# Altium PCB POT 2x8.PcbDoc
Units mm, origin at the board's own origin, x right, y up, seen from the top; angles counter-clockwise.
Board outline 123 x 37.95 mm, 4 copper layers (Top Layer, Mid Layer 1, Mid Layer 2, Bottom Layer), stack 0.97 mm thick; 84 components, 86 nets, 383 pads, 105 vias.
Unrouted connection lines stored in the file: 15.
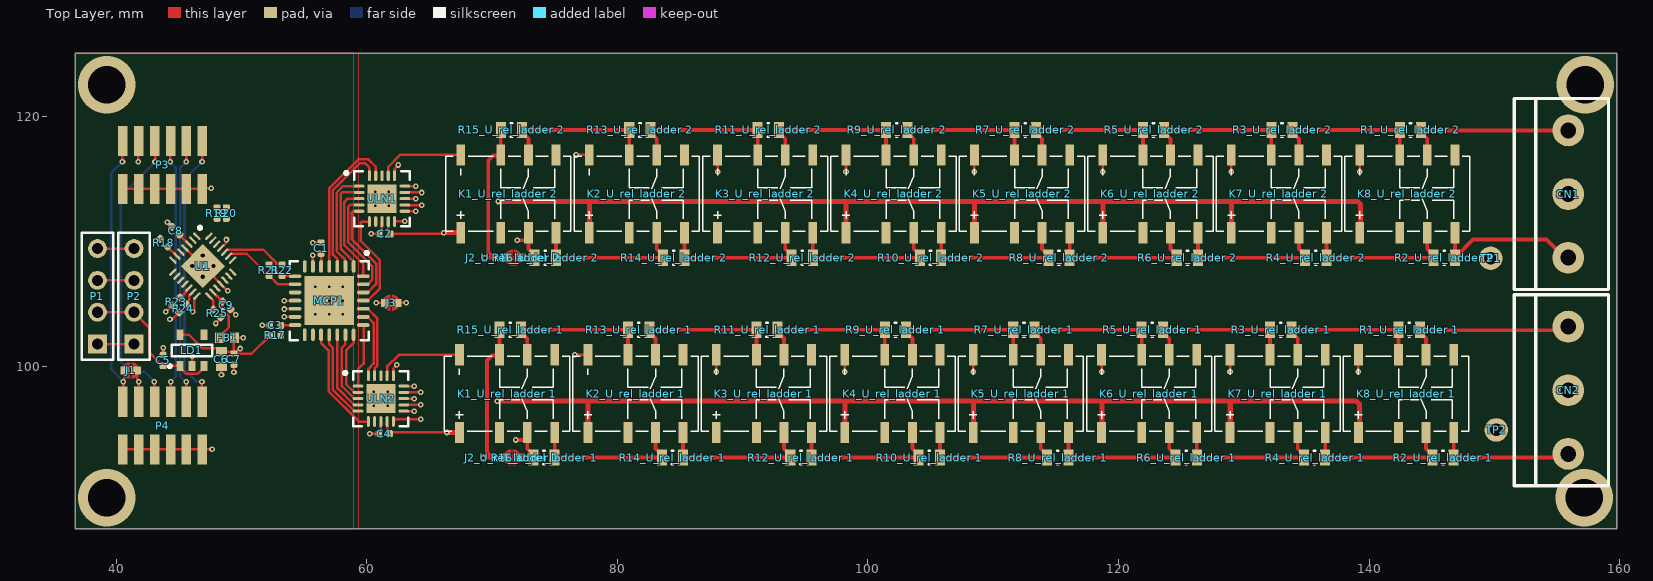
[diagram p0: Top Layer view]
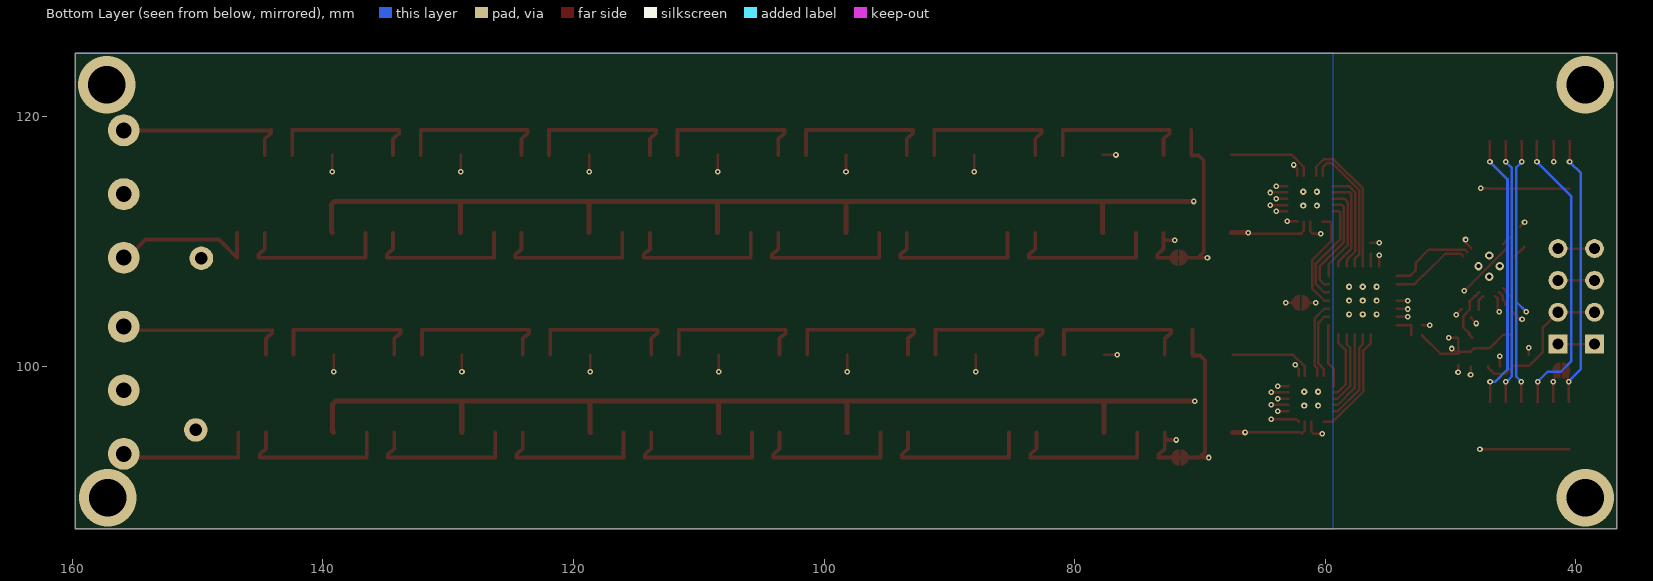
[diagram p1: Bottom Layer view, seen from below]
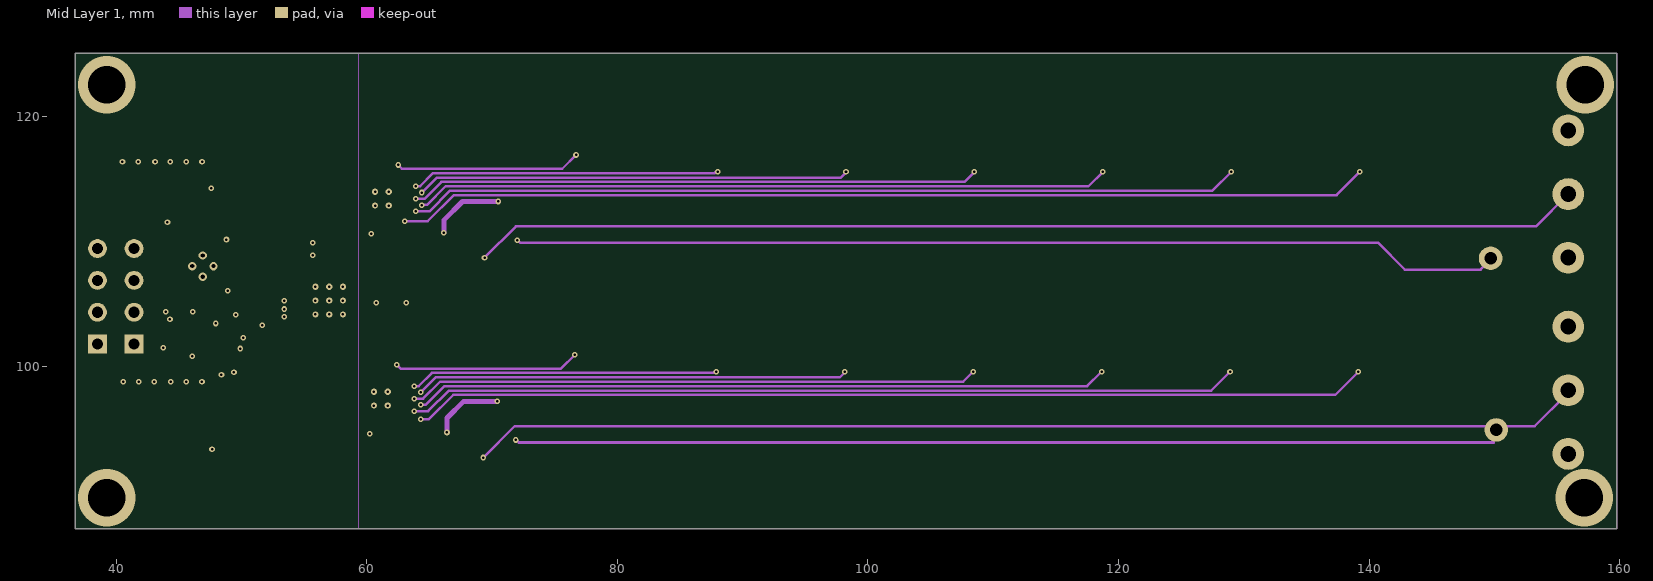
[diagram p2: Mid Layer 1]
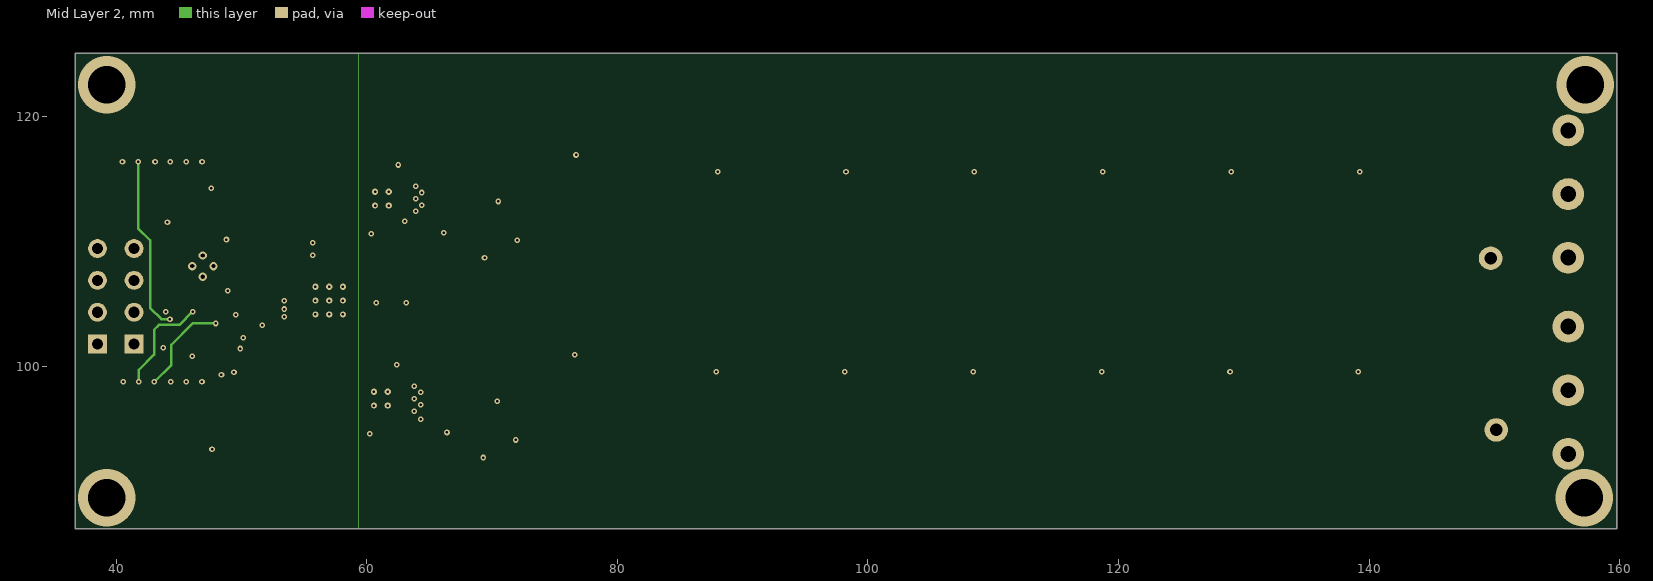
[diagram p3: Mid Layer 2]
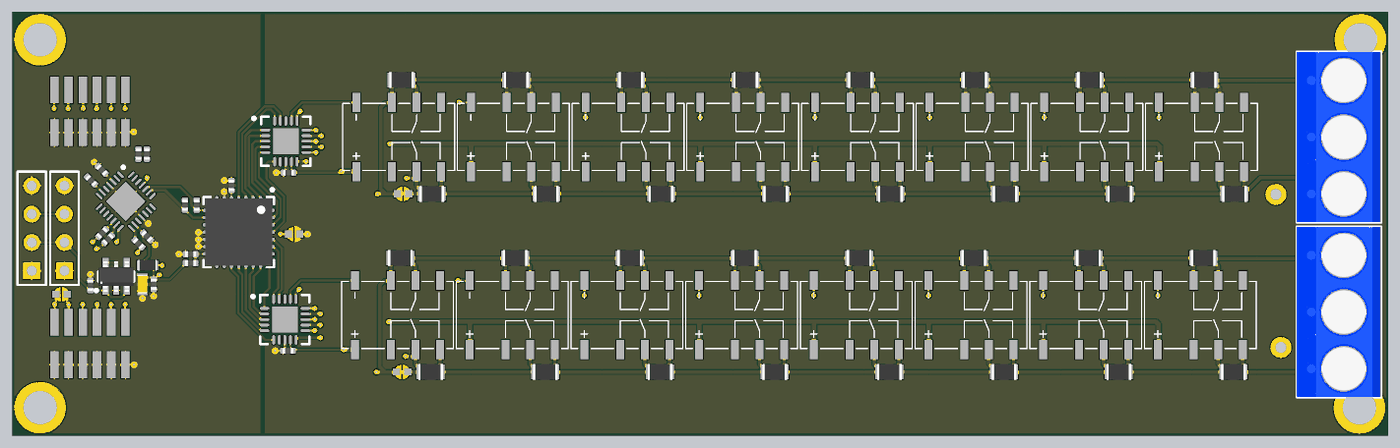
[diagram p4: 3D render of the assembled board from above, using the file's embedded part models]

## Layer stack, top to bottom
Top Solder: solder mask 0.0127, Solder Resist, Dk 3.8
Top Layer: signal copper 0.035
Dielectric 1: prepreg 0.1, 2313, Dk 4.05
Mid Layer 1: signal copper 0.0175
Core: core 0.665, FR-4, Dk 4.5
Mid Layer 2: signal copper 0.0175
Dielectric 2: prepreg 0.1, 2313, Dk 4.05
Bottom Layer: signal copper 0.035
Bottom Solder: solder mask 0.0127, Solder Resist, Dk 3.8

## Board outline
36.75,87.05 36.75,125 159.75,125 159.75,87.05

## Design rules (kind name [scope] priority, off if disabled: settings)
BoardOutlineClearance [All] p1: gap=0.2 ignorepadtopadclearanceinfootprint=FALSE
Clearance [All] p1: gap=0.102 ignorepadtopadclearanceinfootprint=FALSE except(0.127: Arc-Via Track-Via SMDPad-Via THPad-Via Via-Via Via-Fill Via-Poly Via-Region Via-Text; 0.25: Arc-Hole Track-Hole SMDPad-Hole THPad-Hole Via-Hole Fill-Hole Poly-Hole Region-Hole Text-Hole)
ComponentClearance [All] p1: gap=0.102 collisioncheckmode=3 verticalgap=0.102 showdistances=TRUE
DiffPairsRouting [All] p1: maxlimit=0.102 minlimit=0.102 mostfreqgap=0.102 toplayer_minwidth=0.102 toplayer_maxwidth=1816.048 toplayer_prefwidth=0.102 midlayer1_minwidth=0.102 midlayer1_maxwidth=1816.048 midlayer1_prefwidth=0.102 midlayer2_minwidth=0.102 midlayer2_maxwidth=1816.048 midlayer2_prefwidth=0.102 bottomlayer_minwidth=0.102 bottomlayer_maxwidth=1816.048 bottomlayer_prefwidth=0.102 maxuncoupledlength=12.7
Height [All] p1: minheight=0 maxheight=1816.048 prefheight=12.7
HoleSize [All] p1: absolutevalues=TRUE maxlimit=6.3 minlimit=0.2 maxpercent=80.000 minpercent=20.000
HoleToHoleClearance [All] p1: gap=0.25 allowstackedmicrovias=FALSE
MinimumAnnularRing [All] p1: minimumring=0.076
MinimumSolderMaskSliver [All] p1: minsoldermaskwidth=0
PlaneClearance [All] p1: clearance=0.102
PlaneConnect PlaneConnectPowerPads [InPadClass('PowerPads')] p1: planeconnectstyle=Direct reliefexpansion=0.508 reliefentries=4 reliefconductorwidth=0.254 reliefairgap=0.254
PlaneConnect [All] p2: pad.planeconnectstyle=Relief pad.reliefexpansion=0.3 pad.reliefentries=4 pad.reliefconductorwidth=0.102 pad.reliefairgap=0.102 via.planeconnectstyle=Direct via.reliefexpansion=0.3 via.reliefentries=4 via.reliefconductorwidth=0.127 via.reliefairgap=0.127
PolygonConnect PolygonConnectPowerPads [All vs (InPadClass('PowerPads'))] p1: connectstyle=Direct reliefconductorwidth=0.254 reliefentries=4 polygonreliefangle="90 Angle" airgapwidth=0.254
PolygonConnect [All] p2: thpad.connectstyle=Relief thpad.reliefconductorwidth=0.102 thpad.reliefentries=4 thpad.polygonreliefangle="90 Angle" thpad.airgapwidth=0.102 smdpad.connectstyle=Relief smdpad.reliefconductorwidth=0.102 smdpad.reliefentries=4 smdpad.polygonreliefangle="90 Angle" smdpad.airgapwidth=0.102 via.connectstyle=Direct via.reliefconductorwidth=0.127 via.reliefentries=4 via.polygonreliefangle="90 Angle" via.airgapwidth=0.127
RoomDefinition "POT 2x8" [InComponentClass('POT 2x8')] p1: confinementstyle=ConfineIn formatcopy=TRUE lockcomponents=FALSE outline 36.85,89.95 159.5,89.95 159.5,123.9 36.85,123.9
RoomDefinition "U_rel_ladder 1" [InComponentClass('U_rel_ladder 1')] p2: confinementstyle=ConfineIn formatcopy=TRUE lockcomponents=FALSE outline 57.8,91.65 162.15,91.65 162.15,104.05 57.8,104.05
RoomDefinition "U_rel_ladder 2" [InComponentClass('U_rel_ladder 2')] p3: confinementstyle=ConfineIn formatcopy=TRUE lockcomponents=FALSE outline 57.9,107.6 162.25,107.6 162.25,120 57.9,120
RoutingVias [All] p1: holewidth=0.2 width=0.45 viastyle="Through Hole" minholewidth=0.2 minwidth=0.45 maxholewidth=6.3 maxwidth=6.55
SilkToSilkClearance [All] p1: silktosilkclearance=0
SilkToSolderMaskClearance [IsPad] p1: minsilkscreentomaskgap=0.102 clearancetoexposedcopper=TRUE
SolderMaskExpansion [All] p1: expansion=0.075 istentingtop=FALSE
Width [All] p1: maxlimit=1816.048 minlimit=0.102 preferedwidth=0.102
20 further rules are at their usual default settings.

## Classes and differential pairs
component class "U_rel_ladder 2": "J2_U_rel_ladder 2" "K1_U_rel_ladder 2" "K2_U_rel_ladder 2" "K3_U_rel_ladder 2" "K4_U_rel_ladder 2" "K5_U_rel_ladder 2" "K6_U_rel_ladder 2" "K7_U_rel_ladder 2" "K8_U_rel_ladder 2" "R1_U_rel_ladder 2" "R2_U_rel_ladder 2" "R3_U_rel_ladder 2" "R4_U_rel_ladder 2" "R5_U_rel_ladder 2" "R6_U_rel_ladder 2" "R7_U_rel_ladder 2" "R8_U_rel_ladder 2" "R9_U_rel_ladder 2" "R10_U_rel_ladder 2" "R11_U_rel_ladder 2" "R12_U_rel_ladder 2" "R13_U_rel_ladder 2" "R14_U_rel_ladder 2" "R15_U_rel_ladder 2" "R16_U_rel_ladder 2"
channel class rel_ladder: U_rel_ladder2 "U_rel_ladder 1"
component class "U_rel_ladder 1": "J2_U_rel_ladder 1" "K1_U_rel_ladder 1" "K2_U_rel_ladder 1" "K3_U_rel_ladder 1" "K4_U_rel_ladder 1" "K5_U_rel_ladder 1" "K6_U_rel_ladder 1" "K7_U_rel_ladder 1" "K8_U_rel_ladder 1" "R1_U_rel_ladder 1" "R2_U_rel_ladder 1" "R3_U_rel_ladder 1" "R4_U_rel_ladder 1" "R5_U_rel_ladder 1" "R6_U_rel_ladder 1" "R7_U_rel_ladder 1" "R8_U_rel_ladder 1" "R9_U_rel_ladder 1" "R10_U_rel_ladder 1" "R11_U_rel_ladder 1" "R12_U_rel_ladder 1" "R13_U_rel_ladder 1" "R14_U_rel_ladder 1" "R15_U_rel_ladder 1" "R16_U_rel_ladder 1"
component class "POT 2x8": C1 C2 C3 C4 C5 C6 C7 C8 C9 CN1 CN2 FB1 J1 J3 LD1 MCP1 P1 P2 P3 P4 R17 R18 R19 R20 R21 R22 R23 R24 R25 TP1 TP2 U1 ULN1 ULN2

## Components (designator, comment, footprint, x,y, rotation, side; value= is the part's Value field where it differs from the comment)
C1 "100n" R1005_0402i_L 56.35,109.46 r270 top
C2 "100n" R1005_0402i_L 61.45,110.6 r180 top
C3 "100n" R1005_0402i_L 52.7,103.3 r0 top
C4 "100n" R1005_0402i_L 61.4,94.65 r180 top
C5 "100n" R1005_0402i_L 43.75,100.5 r90 top
C6 "1u" C1608_0603I_L 48.4,100.6 r270 top
C7 "100n" R1005_0402i_L 49.4,100.6 r270 top
C8 "100n" R1005_0402i_L 44.75,110.85 r135 top
C9 "100n" R1005_0402i_L 48.8,104.9 r315 top
CN1 "VRSTNA SPONKA 3P/16A" "VRSTNA SPONKA 3P/16A" 155.9,118.86 r270 top
CN2 "VRSTNA SPONKA 3P/16A" "VRSTNA SPONKA 3P/16A" 155.9,103.2 r270 top
FB1 "FERITTE BEAD" R1608_0603I_L 48.85,102.3 r180 top
J1 "Terminator" solderJumper 41.158,99.7 r0 top
"J2_U_rel_ladder 1" "JMP_mini" solderJumper 71.6,92.75 r180 top (schematic designator J2)
"J2_U_rel_ladder 2" "JMP_mini" solderJumper 71.7,108.7 r180 top (schematic designator J2)
J3 "JMP_mini" solderJumper 61.95,105.1 r0 top
"K1_U_rel_ladder 1" "DPDT" "AXICOM IM-G Relay" 71.2,97.85 r0 top (schematic designator K1)
"K1_U_rel_ladder 2" "DPDT" "AXICOM IM-G Relay" 71.3,113.8 r0 top (schematic designator K1)
"K2_U_rel_ladder 1" "DPDT" "AXICOM IM-G Relay" 81.45,97.85 r0 top (schematic designator K2)
"K2_U_rel_ladder 2" "DPDT" "AXICOM IM-G Relay" 81.55,113.8 r0 top (schematic designator K2)
"K3_U_rel_ladder 1" "DPDT" "AXICOM IM-G Relay" 91.7,97.85 r0 top (schematic designator K3)
"K3_U_rel_ladder 2" "DPDT" "AXICOM IM-G Relay" 91.8,113.8 r0 top (schematic designator K3)
"K4_U_rel_ladder 1" "DPDT" "AXICOM IM-G Relay" 101.95,97.85 r0 top (schematic designator K4)
"K4_U_rel_ladder 2" "DPDT" "AXICOM IM-G Relay" 102.05,113.8 r0 top (schematic designator K4)
"K5_U_rel_ladder 1" "DPDT" "AXICOM IM-G Relay" 112.2,97.85 r0 top (schematic designator K5)
"K5_U_rel_ladder 2" "DPDT" "AXICOM IM-G Relay" 112.3,113.8 r0 top (schematic designator K5)
"K6_U_rel_ladder 1" "DPDT" "AXICOM IM-G Relay" 122.45,97.85 r0 top (schematic designator K6)
"K6_U_rel_ladder 2" "DPDT" "AXICOM IM-G Relay" 122.55,113.8 r0 top (schematic designator K6)
"K7_U_rel_ladder 1" "DPDT" "AXICOM IM-G Relay" 132.7,97.85 r0 top (schematic designator K7)
"K7_U_rel_ladder 2" "DPDT" "AXICOM IM-G Relay" 132.8,113.8 r0 top (schematic designator K7)
"K8_U_rel_ladder 1" "DPDT" "AXICOM IM-G Relay" 142.95,97.85 r0 top (schematic designator K8)
"K8_U_rel_ladder 2" "DPDT" "AXICOM IM-G Relay" 143.05,113.8 r0 top (schematic designator K8)
LD1 "NCP115 3.3V" TSOP95P280X110-6L 46.05,101.3 r90 top
MCP1 "MCP32017" "MCP23017 QFN" 57,105.275 r270 top
P1 "PWR" HDR1X4 38.505,101.809 r90 top
P2 "PWR" HDR1X4 41.426,101.809 r90 top
P3 "Input" "1.27mm SMD conn" 43.7,116.1 r180 top
P4 "Output" "1.27mm SMD conn" 43.7,95.3 r180 top
"R1_U_rel_ladder 1" "R/2" R2012_0805I_L 143.2,102.95 r180 top (schematic designator R1)
"R1_U_rel_ladder 2" "R/2" R2012_0805I_L 143.3,118.9 r180 top (schematic designator R1)
"R2_U_rel_ladder 1" "R/2" R2012_0805I_L 145.9,92.75 r180 top (schematic designator R2)
"R2_U_rel_ladder 2" "R/2" R2012_0805I_L 146,108.7 r180 top (schematic designator R2)
"R3_U_rel_ladder 1" "R/4" R2012_0805I_L 132.95,102.95 r180 top (schematic designator R3)
"R3_U_rel_ladder 2" "R/4" R2012_0805I_L 133.05,118.9 r180 top (schematic designator R3)
"R4_U_rel_ladder 1" "R/4" R2012_0805I_L 135.65,92.75 r180 top (schematic designator R4)
"R4_U_rel_ladder 2" "R/4" R2012_0805I_L 135.75,108.7 r180 top (schematic designator R4)
"R5_U_rel_ladder 1" "R/8" R2012_0805I_L 122.7,102.95 r180 top (schematic designator R5)
"R5_U_rel_ladder 2" "R/8" R2012_0805I_L 122.8,118.9 r180 top (schematic designator R5)
"R6_U_rel_ladder 1" "R/8" R2012_0805I_L 125.4,92.75 r180 top (schematic designator R6)
"R6_U_rel_ladder 2" "R/8" R2012_0805I_L 125.5,108.7 r180 top (schematic designator R6)
"R7_U_rel_ladder 1" "R/16" R2012_0805I_L 112.45,102.95 r180 top (schematic designator R7)
"R7_U_rel_ladder 2" "R/16" R2012_0805I_L 112.55,118.9 r180 top (schematic designator R7)
"R8_U_rel_ladder 1" "R/16" R2012_0805I_L 115.15,92.75 r180 top (schematic designator R8)
"R8_U_rel_ladder 2" "R/16" R2012_0805I_L 115.25,108.7 r180 top (schematic designator R8)
"R9_U_rel_ladder 1" "R/32" R2012_0805I_L 102.2,102.95 r180 top (schematic designator R9)
"R9_U_rel_ladder 2" "R/32" R2012_0805I_L 102.3,118.9 r180 top (schematic designator R9)
"R10_U_rel_ladder 1" "R/32" R2012_0805I_L 104.9,92.75 r180 top (schematic designator R10)
"R10_U_rel_ladder 2" "R/32" R2012_0805I_L 105,108.7 r180 top (schematic designator R10)
"R11_U_rel_ladder 1" "R/64" R2012_0805I_L 91.95,102.95 r180 top (schematic designator R11)
"R11_U_rel_ladder 2" "R/64" R2012_0805I_L 92.05,118.9 r180 top (schematic designator R11)
"R12_U_rel_ladder 1" "R/64" R2012_0805I_L 94.65,92.75 r180 top (schematic designator R12)
"R12_U_rel_ladder 2" "R/64" R2012_0805I_L 94.75,108.7 r180 top (schematic designator R12)
"R13_U_rel_ladder 1" "R/128" R2012_0805I_L 81.7,102.95 r180 top (schematic designator R13)
"R13_U_rel_ladder 2" "R/128" R2012_0805I_L 81.8,118.9 r180 top (schematic designator R13)
"R14_U_rel_ladder 1" "R/128" R2012_0805I_L 84.4,92.75 r180 top (schematic designator R14)
"R14_U_rel_ladder 2" "R/128" R2012_0805I_L 84.5,108.7 r180 top (schematic designator R14)
"R15_U_rel_ladder 1" "R/256" R2012_0805I_L 71.45,102.95 r180 top (schematic designator R15)
"R15_U_rel_ladder 2" "R/256" R2012_0805I_L 71.55,118.9 r180 top (schematic designator R15)
"R16_U_rel_ladder 1" "R/256" R2012_0805I_L 74.15,92.75 r180 top (schematic designator R16)
"R16_U_rel_ladder 2" "R/256" R2012_0805I_L 74.25,108.7 r180 top (schematic designator R16)
R17 "100k" R1005_0402i_L 52.7,102.5 r0 top
R18 "500" R1005_0402i_L 43.8,109.9 r315 top
R19 "100k" R1005_0402i_L 48.035,112.265 r270 top
R20 "100k" R1005_0402i_L 48.785,112.265 r270 top
R21 "10k" R1005_0402i_L 52.2,107.7 r270 top
R22 "10k" R1005_0402i_L 53.25,107.7 r270 top
R23 "500" R1005_0402i_L 44.8,105.2 r45 top
R24 "500" R1005_0402i_L 45.339,104.639 r45 top
R25 "500" R1005_0402i_L 48.05,104.25 r135 top
TP1 "PAD" PAD_CIRC_HOLE 149.7,108.65 r90 top
TP2 "PAD" PAD_CIRC_HOLE 150.15,94.95 r90 top
U1 "ATtiny88-MMU" 28M1_N 46.914,108.027 r315 top
ULN1 "ULN2803" QFN127P600-8N 61.214,113.411 r0 top
ULN2 "ULN2803" QFN127P600-8N 61.125,97.45 r0 top

## Footprints (in the part's own frame and the unit in brackets; to place one, negate y for a bottom-side part, rotate by r counter-clockwise, add the part's x,y. Pads: shape width x height; smd on the part's side, far side on the other; paste and mask are expansions set on the pad)
"1.27mm SMD conn" [mm]
  rect 0.76x2.4 smd: 1(3.175,1.905) 2(3.175,-1.905) 3(1.905,1.905) 4(1.905,-1.905) 5(0.635,1.905) 6(0.635,-1.905) 7(-0.635,1.905) 8(-0.635,-1.905) 9(-1.905,1.905) 10(-1.905,-1.905) 11(-3.175,1.905) 12(-3.175,-1.905)
28M1_N [mm]
  oval 0.75x0.2 smd: 1(-2.025,1.35) 2(-2.025,0.9) 3(-2.025,0.45) 4(-2.025,0) 5(-2.025,-0.45) 6(-2.025,-0.9) 7(-2.025,-1.35) 15(2.025,-1.35) 16(2.025,-0.9) 17(2.025,-0.45) 18(2.025,0) 19(2.025,0.45) 20(2.025,0.9) 21(2.025,1.35)
  oval 0.2x0.75 smd: 8(-1.35,-2.025) 9(-0.9,-2.025) 10(-0.45,-2.025) 11(0,-2.025) 12(0.45,-2.025) 13(0.9,-2.025) 14(1.35,-2.025) 22(1.35,2.025) 23(0.9,2.025) 24(0.45,2.025) 25(0,2.025) 26(-0.45,2.025) 27(-0.9,2.025) 28(-1.35,2.025)
  rect 2.5x2.5 smd: 29(0,0)
  silkscreen extent -2.45,1.88 -2.2,2.12, body extent -2.03,-2.02 2.03,2.03, height 1
"AXICOM IM-G Relay" [mm] "TE CONNECTIVITY AXICOM IM-G (Gull wings) Relay SMD"
  rect 0.7x1.7 smd: 1(-3.8,-3.1) 2(-0.6,-3.1) 3(1.6,-3.1) 4(3.8,-3.1) 5(3.8,3.1) 6(1.6,3.1) 7(-0.6,3.1) 8(-3.8,3.1)
  silkscreen extent -5,-3 5,3
C1608_0603I_L [mm] "Chip Capacitor, 2-Leads, Body 1.57x0.85mm, IPC High Density"
  rect 0.72x0.9 smd: 1(-0.6,0) 2(0.6,0)
  body extent -0.82,-0.48 0.82,0.48, height 0.95
HDR1X4 [mm] "Connector; Header; 4 Position"
  rect 1.5x1.5 hole 0.9: 1(0,0)
  round 1.5 hole 0.9: 2(2.54,0) 3(5.08,0) 4(7.62,0)
  silkscreen extent -1.27,-1.27 8.89,1.27
"MCP23017 QFN" [mm] "QFN, 28-Leads, Body 6,00x6,00mm, Pitch 0,65mm, Thermal Pad 3,93x3,93mm, IPC High Density"
  oval 1x0.3 smd: 1(-2.725,1.95) 2(-2.725,1.3) 3(-2.725,0.65) 4(-2.725,0) 5(-2.725,-0.65) 6(-2.725,-1.3) 7(-2.725,-1.95) 15(2.725,-1.95) 16(2.725,-1.3) 17(2.725,-0.65) 18(2.725,0) 19(2.725,0.65) 20(2.725,1.3) 21(2.725,1.95)
  oval 0.3x1 smd: 8(-1.95,-2.725) 9(-1.3,-2.725) 10(-0.65,-2.725) 11(0,-2.725) 12(0.65,-2.725) 13(1.3,-2.725) 14(1.95,-2.725) 22(1.95,2.725) 23(1.3,2.725) 24(0.65,2.725) 25(0,2.725) 26(-0.65,2.725) 27(-1.3,2.725) 28(-1.95,2.725)
  rect 3.93x3.93 smd: 29(0,0)
  silkscreen extent -3.92,-3.15 3.15,3.15, body extent -3,-3 3,3, height 0.9
PAD_CIRC_HOLE [mil]
  round 74 hole 39.4: 1(0,0)
QFN127P600-8N [mm]
  oval 0.85x0.25 smd: 1(-1.825,1) 2(-1.825,0.5) 3(-1.825,0) 4(-1.825,-0.5) 5(-1.825,-1) 11(1.825,-1) 12(1.825,-0.5) 13(1.825,0) 14(1.825,0.5) 15(1.825,1)
  oval 0.25x0.85 smd: 6(-1,-1.825) 7(-0.5,-1.825) 8(0,-1.825) 9(0.5,-1.825) 10(1,-1.825) 16(1,1.825) 17(0.5,1.825) 18(0,1.825) 19(-0.5,1.825) 20(-1,1.825)
  rect 2.3x2.3 smd: 21(0,0)
  silkscreen extent -2.97,-2.2 2.2,2.2, body extent -2.05,-2.05 2.05,2.05, height 0.8
R1005_0402i_L [mm] "Resistor, Chip; 1.00 mm L X 0.50 mm W X 0.40 mm H body"
  rrect50% 0.52x0.56 smd: 1(-0.44,0) 2(0.44,0)
  body extent -0.5,-0.25 0.5,0.25, height 0.4
R1608_0603I_L [mm] "Chip Resistor, 2-Leads, Body 1.57x0.85mm, IPC High Density"
  rect 0.7x0.85 smd: 1(-0.6,0) 2(0.6,0)
  body extent -0.82,-0.48 0.82,0.48, height 0.5
R2012_0805I_L [mm] "Chip Resistor, 2-Leads, Body 2.05x1.25mm, IPC High Density"
  rect 0.8x1.3 smd: 1(-0.85,0) 2(0.85,0)
  silkscreen extent -0.05,-0.55 0.05,0.55, body extent -1.1,-0.7 1.1,0.7, height 0.8
solderJumper [mil]
  rect 25x25 smd: 1(20,0) 2(-20,0)
  Top Layer region: 2.51,25 12.08,23.1 20.19,17.68 25.61,9.57 27.51,0 27.51,0 25.61,-9.57 20.19,-17.68 12.08,-23.1 2.51,-25 2.51,-25
  Top Layer region: -2.51,25 -12.08,23.1 -20.19,17.68 -25.61,9.57 -27.51,0 -27.51,0 -25.61,-9.57 -20.19,-17.68 -12.08,-23.1 -2.51,-25 -2.51,-25
TSOP95P280X110-6L [mm]
  rect 0.8x0.55 smd: 1(-1.25,0.95) 2(-1.25,0) 3(-1.25,-0.95) 4(1.25,-0.95) 5(1.25,0.95)
  silkscreen extent -1.37,-1.6 0.45,1.9, body extent -1.38,-1.6 1.38,1.6, height 1.1
"VRSTNA SPONKA 3P/16A" [mm]
  round 2.54 hole 1.27: 1(0,0) 2(5.08,0) 3(10.16,0)
  silkscreen extent -2.54,-4.32 12.7,3.2, body extent -2.54,-4.33 12.7,3.17, height 10

## Part data
C1 C2 C3 C4 C5 C6 C7 C8 C9: library part C, "Capacitor"
J1: library part JMP_mini
"K1_U_rel_ladder 1" "K1_U_rel_ladder 2" "K2_U_rel_ladder 1" "K2_U_rel_ladder 2" "K3_U_rel_ladder 1" "K3_U_rel_ladder 2" "K4_U_rel_ladder 1" "K4_U_rel_ladder 2" "K5_U_rel_ladder 1" "K5_U_rel_ladder 2" "K6_U_rel_ladder 1" "K6_U_rel_ladder 2" "K7_U_rel_ladder 1" "K7_U_rel_ladder 2" "K8_U_rel_ladder 1" "K8_U_rel_ladder 2": library part "IM-GR Relay DPDT", "TE CONNECTIVITY  IM-GR  RELAY, DPDT, NO", Farnell ID=1175070, URL=http://si.farnell.com/te-connectivity-axicom/im06gr/relay-gull-wing-dpco-12vdc-2a/dp/1175070
P1 P2: library part "Header 4", "Header, 4-Pin", LatestRevisionDate=17-Jul-2002, LatestRevisionNote="Re-released for DXP Platform.", Publisher="Altium Limited"
P3 P4: library part "Header 6X2", "Header, 6-Pin, Dual row", LatestRevisionDate=17-Jul-2002, LatestRevisionNote="Re-released for DXP Platform.", Publisher="Altium Limited"
"R1_U_rel_ladder 1" "R1_U_rel_ladder 2" "R2_U_rel_ladder 1" "R2_U_rel_ladder 2" "R3_U_rel_ladder 1" "R3_U_rel_ladder 2" "R4_U_rel_ladder 1" "R4_U_rel_ladder 2" "R5_U_rel_ladder 1" "R5_U_rel_ladder 2" "R6_U_rel_ladder 1" "R6_U_rel_ladder 2" "R7_U_rel_ladder 1" "R7_U_rel_ladder 2" "R8_U_rel_ladder 1" "R8_U_rel_ladder 2" "R9_U_rel_ladder 1" "R9_U_rel_ladder 2" "R10_U_rel_ladder 1" "R10_U_rel_ladder 2" "R11_U_rel_ladder 1" "R11_U_rel_ladder 2" "R12_U_rel_ladder 1" "R12_U_rel_ladder 2" "R13_U_rel_ladder 1" "R13_U_rel_ladder 2" "R14_U_rel_ladder 1" "R14_U_rel_ladder 2" "R15_U_rel_ladder 1" "R15_U_rel_ladder 2" "R16_U_rel_ladder 1" "R16_U_rel_ladder 2" R17 R18 R19 R20 R21 R22 R23 R24 R25: library part R, "R"
U1: "8-bit AVR Microcontroller, 1.8-5.5V, 8KB Flash, 64 Bytes EEPROM, 512 Bytes SRAM, 28-pin MLF, Industrial Grade (-40°C to 85°C), Pb-Free", Supplier Part Number 1=ATTINY88-MMU-ND, ComponentLink1Description="Manufacturer Link", ComponentLink1URL=http://www.atmel.com/products/avr/default.asp?, ComponentLink2Description="ATtiny48/88 Datasheet", ComponentLink2URL=http://www.atmel.com/dyn/resources/prod_documents/doc8008.pdf, ComponentLink3Description="ATtiny48/88 Summary", ComponentLink3URL=http://www.atmel.com/dyn/resources/prod_documents/8008S.pdf, ComponentLink4Description="Atmel.com Home", ComponentLink4URL=http://www.atmel.com, DatasheetVersion="revC, Mar-2009", PackageDescription="28-pad, 4x4x1.0mm Body, Pitch 0.45mm, 2.4x2.4mm Exposed Pad, Plastic Very Thin QFN Package (VQFN)", PackageReference=28M1, PackageVersion="revB, Nov-2008", Published=1-Apr-2010, Publisher="Altium Limited", Supplier 1=Digi-Key, Supplier 2=Mouser, Supplier Part Number 2=556-ATTINY88-MMU

## Via types
v1: diameter 0.45, hole 0.2, Top Layer to Bottom Layer, 80 vias
v2: diameter 0.5, hole 0.2, Top Layer to Bottom Layer, 17 vias
v3: diameter 4.6, hole 3, Top Layer to Bottom Layer, 4 vias
v4: diameter 0.66, hole 0.33, Top Layer to Bottom Layer, 4 vias

## Nets (pads, with @x,y where several pads share a name; then routed paths per layer and width w, separated by ;. In a path a pad name is that pad's centre, name@x,y a point inside that pad or via, vN(x,y) a via of type N, cw(c..) or ccw(c..) an arc to the next point about the centre after c; other vN are vias at no path point)
+3.3V: C1.2 C6.1 C7.1 C8.1 FB1.1 LD1.5 MCP1.5 R17.1 R19.1 R20.1 R21.1 R22.1 U1.3 | length 13.1
  Top Layer w0.2: C8.1 45.061,110.516 U1.3 ; LD1.5 45.8,102.55 46.89,101.46 48.14,101.46 C6.1 49.204,101.2 49.364,101.04 C7.1 ; v1(49.9,101.45) 49.846,101.45 C7.1@49.436,101.04 ; v1(50.15,102.3) FB1.1 49.4,102.25 C7.1 ; R17.1 52.26,102.48 50.82,101.04 C7.1@49.436,101.04 ; MCP1.5 C1.2 ; C7.1 C7.1@49.436,101.04
+5: C5.1 LD1.1 LD1.3 P1.2 P2.2 | length 12.1
  Top Layer w0.2: P1.2 P2.2 42.632,103.143 42.632,101.158 43.73,100.06 C5.1 LD1.1@45.09,100.06 ; LD1.1 LD1.1@45.09,100.06 ; LD1.3 47,99.925 46.523,99.448 45.577,99.448 45.09,99.935 LD1.1@45.09,100.06
+12: "K1_U_rel_ladder 1.1" "K1_U_rel_ladder 2.1" "K2_U_rel_ladder 1.1" "K2_U_rel_ladder 2.1" "K3_U_rel_ladder 1.1" "K3_U_rel_ladder 2.1" "K4_U_rel_ladder 1.1" "K4_U_rel_ladder 2.1" "K5_U_rel_ladder 1.1" "K5_U_rel_ladder 2.1" "K6_U_rel_ladder 1.1" "K6_U_rel_ladder 2.1" "K7_U_rel_ladder 1.1" "K7_U_rel_ladder 2.1" "K8_U_rel_ladder 1.1" "K8_U_rel_ladder 2.1" C2.1 C4.1 P1.3 P2.3 ULN1.9 ULN2.9 | length 195.5
  Top Layer w0.2: P1.3 P2.3 ; ULN2.9 61.625,94.901 61.84,94.686 C4.1 61.94,94.75 v1(66.4,94.75) ; ULN1.9 61.714,110.862 61.94,110.636 C2.1@61.94,110.6 ; C2.1 C2.1@61.94,110.6 ; v1(66.15,110.7) 66.082,110.7 65.982,110.6 C2.1@61.94,110.6
  Top Layer w0.4: v1(66.15,110.7) 67.5,110.7 ; v1(66.4,94.75) 67.4,94.75 ; v1(70.401,97.237) 70.414,97.25 77.669,97.25 ; v1(70.501,113.188) 70.514,113.2 77.769,113.2 ; 77.65,94.75 77.669,94.769 77.669,97.25 ; 77.75,110.7 77.769,110.719 77.769,113.2 ; 98.15,94.75 98.169,94.769 98.169,97.25 ; 98.25,110.7 98.269,110.719 98.269,113.2 ; 108.4,94.75 108.419,94.769 108.419,97.25 ; 108.5,110.7 108.519,110.719 108.519,113.2 ; 118.65,94.75 118.669,94.769 118.669,97.25 ; 118.75,110.7 118.769,110.719 118.769,113.2 ; 128.9,94.75 128.919,94.769 128.919,97.25 ; 129,110.7 129.019,110.719 129.019,113.2 ; 139.15,94.75 139.219,94.819 139.219,97.016 138.985,97.25 128.919,97.25 ; 139.25,110.7 139.319,110.769 139.319,112.966 139.085,113.2 129.019,113.2 ; 77.669,97.25 98.169,97.25 ; 77.769,113.2 98.269,113.2 ; 98.169,97.25 108.419,97.25 ; 98.269,113.2 108.519,113.2 ; 108.419,97.25 118.669,97.25 ; 108.519,113.2 118.769,113.2 ; 118.669,97.25 128.919,97.25 ; 118.769,113.2 129.019,113.2
  Mid Layer 1 w0.4: v1(66.15,110.7) 66.15,111.7 67.637,113.188 v1(70.501,113.188) ; v1(66.4,94.75) 66.4,95.9 67.737,97.237 v1(70.401,97.237)
A1: "K8_U_rel_ladder 2.6" "R1_U_rel_ladder 2.1" CN1.1 | length 14
  Top Layer w0.3: 144.65,116.9 144.65,118.2 144.45,118.4 144.4,118.4 144.15,118.65 144.15,118.9 144.19,118.86 CN1.1
A2: "K8_U_rel_ladder 1.6" "R1_U_rel_ladder 1.1" CN2.1 | length 14
  Top Layer w0.3: 144.55,100.95 144.55,102.25 144.35,102.45 144.3,102.45 144.05,102.7 144.05,102.95 144.09,102.91 CN2.1@155.8,102.91
AVCC: C9.1 FB1.2 U1.16 | length 4.5
  Top Layer w0.2: U1.16 48.061,105.607 48.093,105.607 C9.1 48.475,105.197 48.475,104.544 49,104.019 49,103.15 48.5,102.65 48.5,102.55 FB1.2
B1: "J2_U_rel_ladder 2.1" "J2_U_rel_ladder 2.2" "K1_U_rel_ladder 2.3" "K1_U_rel_ladder 2.7" "R15_U_rel_ladder 2.2" "R16_U_rel_ladder 2.2" CN1.2 TP1.1 | length 185.8
  Top Layer w0.3: v1(69.4,108.7) 70.15,108.7 ; 70.7,118.9 70.7,116.9 70.65,116.85 70.1,116.85 69.7,116.45 69.7,109.15 70.15,108.7 ; v1(72,110.1) 72.7,110.1 72.9,110.3 ; 72.9,110.7 72.9,110.3 ; 70.15,108.7 71.192,108.7 72.208,108.7 73.4,108.7 73.4,108.95 73.15,109.2 73.1,109.2 72.9,109.4 72.9,110.3
  Mid Layer 1 w0.2: v1(69.4,108.7) 71.9,111.2 153.32,111.2 CN1.2 ; v1(72,110.1) 72.042,110.1 72.242,109.9 140.7,109.9 142.85,107.75 148.896,107.75 149.296,108.15 TP1.1@149.75,108.15
B2: "J2_U_rel_ladder 1.1" "J2_U_rel_ladder 1.2" "K1_U_rel_ladder 1.3" "K1_U_rel_ladder 1.7" "R15_U_rel_ladder 1.2" "R16_U_rel_ladder 1.2" CN2.2 TP2.1 | length 185.1
  Top Layer w0.3: v1(69.3,92.75) 70.05,92.75 ; 70.6,102.95 70.6,100.95 70.55,100.9 70,100.9 69.6,100.5 69.6,93.2 70.05,92.75 ; v1(71.9,94.15) 72.6,94.15 72.8,94.35 ; 72.8,94.75 72.8,94.35 ; 70.05,92.75 71.092,92.75 72.108,92.75 73.3,92.75 73.3,93 73.05,93.25 73,93.25 72.8,93.45 72.8,94.35
  Mid Layer 1 w0.2: v1(69.3,92.75) 71.8,95.25 153.22,95.25 CN2.2@155.8,97.83 ; v1(71.9,94.15) 71.942,94.15 72.142,93.95 149.95,93.95
C1: "K8_U_rel_ladder 2.4" "R2_U_rel_ladder 2.1" CN1.3 | length 12.3
  Top Layer w0.3: 146.85,110.7 146.85,108.7 148.3,110.15 154.166,110.15 155.616,108.7 CN1.3
C2: "K8_U_rel_ladder 1.4" "R2_U_rel_ladder 1.1" CN2.3 | length 11.1
  Top Layer w0.3: 146.75,94.75 146.75,92.75 CN2.3@155.8,92.75
GND: C1.1 C3.1 C5.2 C6.2 C7.2 C8.2 C9.2 J3.2 LD1.2 MCP1.6 MCP1.11 MCP1.12 MCP1.13 P1.1 P1.4 P2.1 P2.4 P3.1 P3.3 P3.5 P3.7 P3.9 P3.11 P4.1 P4.3 P4.5 P4.7 P4.9 P4.11 U1.4 U1.18 U1.29 | length 38.7
  Top Layer w0.2: P1.1 P2.1 ; P1.4 P2.4 ; P4.1 P4.11 46.88,93.4 v1(47.65,93.4) ; P3.1 P3.5 ; P3.3 P3.5 ; C5.2 v1(43.75,101.5) ; v1(44.091,111.538) 44.091,111.524 44.439,111.175 C8.2 ; U1.4 U1.18 ; P3.9 P3.11 ; LD1.2 46.08,100.08 v1(46.08,100.828) ; U1.29 U1.18 ; v1(47.6,114.25) 46.93,114.25 P3.11 ; v1(48.4,99.35) C6.2 ; v1(48.9,106.05) 48.891,106.05 U1.18 ; C9.2 v1(49.55,104.15) ; v1(49.4,99.55) C7.2 ; v1(51.65,103.3) C3.1 ; v1(53.4,104) 53.413,103.987 54.263,103.987 MCP1.13 ; v1(53.4,104.6) 53.412,104.612 54.262,104.612 MCP1.12 ; v1(53.4,105.25) 53.412,105.262 54.263,105.262 MCP1.11 ; MCP1.6 v1(55.7,108.9) ; v1(55.7,109.9) C1.1 ; v1(60.75,105.1) J3.2 ; P3.5 P3.11
  other v4: 46.914,107.179 46.065,108.027 47.762,108.027 46.914,108.876
INT: P3.12 P4.12 R18.1 R20.2 | length 22.2
  Top Layer w0.2: v1(46.848,98.795) 46.848,97.232 P4.12 ; v1(46.85,116.35) 46.85,117.98 P3.12
  Bottom Layer w0.2: v1(46.848,98.795) 46.455,98.795 45.452,99.798 45.452,114.952 v1(46.85,116.35)
MISO: J1.2 P3.2 P4.2 | length 22.5
  Top Layer w0.2: v1(40.5,116.35) 40.5,117.98 P3.2 ; P4.2 40.55,97.23 v1(40.55,98.8) 40.55,98.868 40.65,98.968 J1.2
  Bottom Layer w0.2: v1(40.5,116.35) 39.6,115.45 39.6,99.818 40.55,98.868 v1(40.55,98.8)
MISO_T88: J1.1 P4.4 U1.14 | length 12.3
  Top Layer w0.2: J1.1 41.666,99.002 41.8,98.868 v1(41.8,98.8) 41.8,97.21 P4.4 ; v1(46.1,104.4) 46.1,104.468 46.242,104.609 46.242,105.446 U1.14
  Mid Layer 2 w0.2: v1(41.8,98.8) 41.8,99.75 43.02,100.97 43.02,102.949 43.41,103.34 45.04,103.34 v1(46.1,104.4)
MOSI_T88: P3.4 R24.1 | length 16.6
  Top Layer w0.2: v1(41.75,116.35) 41.75,117.96 P3.4 ; v1(44.292,103.792) 44.298,103.798 44.498,103.798 R24.1
  Mid Layer 2 w0.2: v1(41.75,116.35) 41.75,111.041 42.7,110.091 42.7,104.7 43.608,103.792 v1(44.292,103.792)
NetC3_2: C3.2 MCP1.14 R17.2 | length 1.9
  Top Layer w0.2: R17.2 C3.2 53.152,103.312 54.262,103.312 MCP1.14
"NetK1_U_rel_ladder 1_4": "K1_U_rel_ladder 1.4" "K2_U_rel_ladder 1.3" "R14_U_rel_ladder 1.2" "R16_U_rel_ladder 1.1" | length 12.8
  Top Layer w0.3: 75,94.75 75,92.75 83.55,92.75 83.55,93 83.3,93.25 83.25,93.25 83.05,93.45 83.05,94.75
"NetK1_U_rel_ladder 1_6": "K1_U_rel_ladder 1.6" "K2_U_rel_ladder 1.7" "R13_U_rel_ladder 1.2" "R15_U_rel_ladder 1.1" | length 12.8
  Top Layer w0.3: 72.8,100.95 72.8,102.25 72.6,102.45 72.55,102.45 72.3,102.7 72.3,102.95 80.85,102.95 80.85,100.95
"NetK1_U_rel_ladder 1_8": "K1_U_rel_ladder 1.8" ULN2.17 | length 14.3
  Top Layer w0.2: ULN2.17@61.622,99.294 61.614,99.286 ULN2.17@61.622,99.294 ; ULN2.17@61.622,99.294 ULN2.17@61.622,99.483 ; ULN2.17@61.622,99.294 ULN2.17@61.622,99.483 ; ULN2.17@61.622,99.483 61.622,100.011 ; ULN2.17@61.622,99.483 61.622,100.011 ; ULN2.17@61.622,99.483 61.622,100.011 ; 61.622,100.011 62.561,100.95 ; 61.622,100.011 62.561,100.95 ; 62.561,100.95 67.4,100.95 62.561,100.95
"NetK1_U_rel_ladder 2_4": "K1_U_rel_ladder 2.4" "K2_U_rel_ladder 2.3" "R14_U_rel_ladder 2.2" "R16_U_rel_ladder 2.1" | length 12.8
  Top Layer w0.3: 75.1,110.7 75.1,108.7 83.65,108.7 83.65,108.95 83.4,109.2 83.35,109.2 83.15,109.4 83.15,110.7
"NetK1_U_rel_ladder 2_6": "K1_U_rel_ladder 2.6" "K2_U_rel_ladder 2.7" "R13_U_rel_ladder 2.2" "R15_U_rel_ladder 2.1" | length 12.8
  Top Layer w0.3: 72.9,116.9 72.9,118.2 72.7,118.4 72.65,118.4 72.4,118.65 72.4,118.9 80.95,118.9 80.95,116.9
"NetK1_U_rel_ladder 2_8": "K1_U_rel_ladder 2.8" ULN1.17 | length 6.9
  Top Layer w0.2: ULN1.17 61.722,115.244 61.722,115.961 62.661,116.9 67.5,116.9
"NetK2_U_rel_ladder 1_4": "K2_U_rel_ladder 1.4" "K3_U_rel_ladder 1.3" "R12_U_rel_ladder 1.2" "R14_U_rel_ladder 1.1" | length 12.8
  Top Layer w0.3: 85.25,94.75 85.25,92.75 93.8,92.75 93.8,93 93.55,93.25 93.5,93.25 93.3,93.45 93.3,94.75
"NetK2_U_rel_ladder 1_6": "K2_U_rel_ladder 1.6" "K3_U_rel_ladder 1.7" "R11_U_rel_ladder 1.2" "R13_U_rel_ladder 1.1" | length 12.8
  Top Layer w0.3: 83.05,100.95 83.05,102.25 82.85,102.45 82.8,102.45 82.55,102.7 82.55,102.95 91.1,102.95 91.1,100.95
"NetK2_U_rel_ladder 1_8": "K2_U_rel_ladder 1.8" ULN2.16 | length 33.6
  Top Layer w0.2: 62.114,99.843 v1@62.4,100.129 ; 62.114,99.843 62.114,99.286 62.114,99.843 ; 62.114,99.843 v1@62.4,100.129 ; v1@62.4,100.129 v1(62.4,100.15) v1@62.4,100.129 ; v1(76.6,100.95) 77.65,100.95 v1(76.6,100.95)
  Mid Layer 1 w0.2: 62.7,99.85 75.5,99.85 ; 62.7,99.85 v1(62.4,100.15) 62.7,99.85 ; 62.7,99.85 75.5,99.85 ; 75.5,99.85 v1(76.6,100.95) 75.5,99.85
  other v1: 62.4,100.15 76.6,100.95
"NetK2_U_rel_ladder 2_4": "K2_U_rel_ladder 2.4" "K3_U_rel_ladder 2.3" "R12_U_rel_ladder 2.2" "R14_U_rel_ladder 2.1" | length 12.8
  Top Layer w0.3: 85.35,110.7 85.35,108.7 93.9,108.7 93.9,108.95 93.65,109.2 93.6,109.2 93.4,109.4 93.4,110.7
"NetK2_U_rel_ladder 2_6": "K2_U_rel_ladder 2.6" "K3_U_rel_ladder 2.7" "R11_U_rel_ladder 2.2" "R13_U_rel_ladder 2.1" | length 12.8
  Top Layer w0.3: 83.15,116.9 83.15,118.2 82.95,118.4 82.9,118.4 82.65,118.65 82.65,118.9 91.2,118.9 91.2,116.9
"NetK2_U_rel_ladder 2_8": "K2_U_rel_ladder 2.8" ULN1.16 | length 16.8
  Top Layer w0.2: ULN1.16 62.214,115.793 62.5,116.079 v1(62.5,116.1) ; v1(76.7,116.9) 77.75,116.9
  Mid Layer 1 w0.2: v1(62.5,116.1) 62.8,115.8 75.6,115.8 v1(76.7,116.9)
"NetK3_U_rel_ladder 1_4": "K3_U_rel_ladder 1.4" "K4_U_rel_ladder 1.3" "R10_U_rel_ladder 1.2" "R12_U_rel_ladder 1.1" | length 12.8
  Top Layer w0.3: 95.5,94.75 95.5,92.75 104.05,92.75 104.05,93 103.8,93.25 103.75,93.25 103.55,93.45 103.55,94.75
"NetK3_U_rel_ladder 1_6": "K3_U_rel_ladder 1.6" "K4_U_rel_ladder 1.7" "R9_U_rel_ladder 1.2" "R11_U_rel_ladder 1.1" | length 12.8
  Top Layer w0.3: 93.3,100.95 93.3,102.25 93.1,102.45 93.05,102.45 92.8,102.7 92.8,102.95 101.35,102.95 101.35,100.95
"NetK3_U_rel_ladder 1_8": "K3_U_rel_ladder 1.8" ULN2.15 | length 53.6
  Top Layer w0.2: ULN2.15@62.945,98.455 62.939,98.461 ULN2.15@62.945,98.455 ; ULN2.15@62.945,98.455 v1@63.795,98.455 ; ULN2.15@62.945,98.455 v1@63.795,98.455 ; v1@63.795,98.455 v1(63.8,98.45) v1@63.795,98.455 ; v1(87.9,99.6) 87.9,100.95 v1(87.9,99.6)
  Mid Layer 1 w0.2: 64.15,98.45 v1(63.8,98.45) 64.15,98.45 ; 64.15,98.45 65.2,99.5 ; 64.15,98.45 65.2,99.5 ; 65.2,99.5 87.658,99.5 ; 65.2,99.5 87.658,99.5 ; 87.658,99.5 v1@87.71,99.552 ; 87.658,99.5 v1@87.71,99.552 ; v1@87.71,99.552 v1@87.852,99.552 ; v1@87.71,99.552 v1@87.852,99.552 ; v1@87.852,99.552 v1(87.9,99.6) v1@87.852,99.552
  other v1: 63.8,98.45 87.9,99.6
"NetK3_U_rel_ladder 2_4": "K3_U_rel_ladder 2.4" "K4_U_rel_ladder 2.3" "R10_U_rel_ladder 2.2" "R12_U_rel_ladder 2.1" | length 12.8
  Top Layer w0.3: 95.6,110.7 95.6,108.7 104.15,108.7 104.15,108.95 103.9,109.2 103.85,109.2 103.65,109.4 103.65,110.7
"NetK3_U_rel_ladder 2_6": "K3_U_rel_ladder 2.6" "K4_U_rel_ladder 2.7" "R9_U_rel_ladder 2.2" "R11_U_rel_ladder 2.1" | length 12.8
  Top Layer w0.3: 93.4,116.9 93.4,118.2 93.2,118.4 93.15,118.4 92.9,118.65 92.9,118.9 101.45,118.9 101.45,116.9
"NetK3_U_rel_ladder 2_8": "K3_U_rel_ladder 2.8" ULN1.15 | length 26.8
  Top Layer w0.2: ULN1.15 63.045,114.405 63.895,114.405 v1(63.9,114.4) ; v1(88,115.55) 88,116.9
  Mid Layer 1 w0.2: v1(63.9,114.4) 64.25,114.4 65.3,115.45 87.758,115.45 87.81,115.502 87.952,115.502 v1(88,115.55)
"NetK4_U_rel_ladder 1_4": "K4_U_rel_ladder 1.4" "K5_U_rel_ladder 1.3" "R8_U_rel_ladder 1.2" "R10_U_rel_ladder 1.1" | length 12.8
  Top Layer w0.3: 105.75,94.75 105.75,92.75 114.3,92.75 114.3,93 114.05,93.25 114,93.25 113.8,93.45 113.8,94.75
"NetK4_U_rel_ladder 1_6": "K4_U_rel_ladder 1.6" "K5_U_rel_ladder 1.7" "R7_U_rel_ladder 1.2" "R9_U_rel_ladder 1.1" | length 12.8
  Top Layer w0.3: 103.55,100.95 103.55,102.25 103.35,102.45 103.3,102.45 103.05,102.7 103.05,102.95 111.6,102.95 111.6,100.95
"NetK4_U_rel_ladder 1_8": "K4_U_rel_ladder 1.8" ULN2.14 | length 74.6
  Top Layer w0.2: ULN2.14@62.944,97.955 62.939,97.961 ULN2.14@62.944,97.955 ; ULN2.14@62.944,97.955 v1@64.295,97.955 ; ULN2.14@62.944,97.955 v1@64.295,97.955 ; v1@64.295,97.955 v1(64.3,97.95) v1@64.295,97.955 ; v1(98.15,99.6) 98.15,100.95 v1(98.15,99.6)
  Mid Layer 1 w0.2: 65.5,99.15 87.711,99.15 ; 65.5,99.15 v1(64.3,97.95) 65.5,99.15 ; 65.5,99.15 87.711,99.15 ; 87.711,99.15 87.713,99.148 ; 87.711,99.15 87.713,99.148 ; 87.713,99.148 97.748,99.148 ; 87.713,99.148 97.748,99.148 ; 97.748,99.148 v1@98.15,99.55 ; 97.748,99.148 v1@98.15,99.55 ; v1@98.15,99.55 v1(98.15,99.6) v1@98.15,99.55
  other v1: 64.3,97.95 98.15,99.6
"NetK4_U_rel_ladder 2_4": "K4_U_rel_ladder 2.4" "K5_U_rel_ladder 2.3" "R8_U_rel_ladder 2.2" "R10_U_rel_ladder 2.1" | length 12.8
  Top Layer w0.3: 105.85,110.7 105.85,108.7 114.4,108.7 114.4,108.95 114.15,109.2 114.1,109.2 113.9,109.4 113.9,110.7
"NetK4_U_rel_ladder 2_6": "K4_U_rel_ladder 2.6" "K5_U_rel_ladder 2.7" "R7_U_rel_ladder 2.2" "R9_U_rel_ladder 2.1" | length 12.8
  Top Layer w0.3: 103.65,116.9 103.65,118.2 103.45,118.4 103.4,118.4 103.15,118.65 103.15,118.9 111.7,118.9 111.7,116.9
"NetK4_U_rel_ladder 2_8": "K4_U_rel_ladder 2.8" ULN1.14 | length 37.3
  Top Layer w0.2: ULN1.14 63.044,113.905 64.395,113.905 v1(64.4,113.9) ; v1(98.25,115.55) 98.25,116.9
  Mid Layer 1 w0.2: v1(64.4,113.9) 65.6,115.1 87.811,115.1 87.813,115.098 97.848,115.098 98.25,115.5 v1(98.25,115.55)
"NetK5_U_rel_ladder 1_4": "K5_U_rel_ladder 1.4" "K6_U_rel_ladder 1.3" "R6_U_rel_ladder 1.2" "R8_U_rel_ladder 1.1" | length 12.8
  Top Layer w0.3: 116,94.75 116,92.75 124.55,92.75 124.55,93 124.3,93.25 124.25,93.25 124.05,93.45 124.05,94.75
"NetK5_U_rel_ladder 1_6": "K5_U_rel_ladder 1.6" "K6_U_rel_ladder 1.7" "R5_U_rel_ladder 1.2" "R7_U_rel_ladder 1.1" | length 12.8
  Top Layer w0.3: 113.8,100.95 113.8,102.25 113.6,102.45 113.55,102.45 113.3,102.7 113.3,102.95 121.85,102.95 121.85,100.95
"NetK5_U_rel_ladder 1_8": "K5_U_rel_ladder 1.8" ULN2.13 | length 47.7
  Top Layer w0.2: ULN2.13@62.939,97.461 62.945,97.455 63.795,97.455 v1(63.8,97.45) ; v1(108.4,99.6) 108.4,100.95
  Mid Layer 1 w0.2: v1(63.8,97.45) 64.5,97.45 65.85,98.8 107.6,98.8 v1(108.4,99.6)
"NetK5_U_rel_ladder 2_4": "K5_U_rel_ladder 2.4" "K6_U_rel_ladder 2.3" "R6_U_rel_ladder 2.2" "R8_U_rel_ladder 2.1" | length 12.8
  Top Layer w0.3: 116.1,110.7 116.1,108.7 124.65,108.7 124.65,108.95 124.4,109.2 124.35,109.2 124.15,109.4 124.15,110.7
"NetK5_U_rel_ladder 2_6": "K5_U_rel_ladder 2.6" "K6_U_rel_ladder 2.7" "R5_U_rel_ladder 2.2" "R7_U_rel_ladder 2.1" | length 12.8
  Top Layer w0.3: 113.9,116.9 113.9,118.2 113.7,118.4 113.65,118.4 113.4,118.65 113.4,118.9 121.95,118.9 121.95,116.9
"NetK5_U_rel_ladder 2_8": "K5_U_rel_ladder 2.8" ULN1.13 | length 47.7
  Top Layer w0.2: ULN1.13 63.045,113.405 63.895,113.405 v1(63.9,113.4) ; v1(108.5,115.55) 108.5,116.9
  Mid Layer 1 w0.2: v1(63.9,113.4) 64.6,113.4 65.95,114.75 107.7,114.75 v1(108.5,115.55)
"NetK6_U_rel_ladder 1_4": "K6_U_rel_ladder 1.4" "K7_U_rel_ladder 1.3" "R4_U_rel_ladder 1.2" "R6_U_rel_ladder 1.1" | length 12.8
  Top Layer w0.3: 126.25,94.75 126.25,92.75 134.8,92.75 134.8,93 134.55,93.25 134.5,93.25 134.3,93.45 134.3,94.75
"NetK6_U_rel_ladder 1_6": "K6_U_rel_ladder 1.6" "K7_U_rel_ladder 1.7" "R3_U_rel_ladder 1.2" "R5_U_rel_ladder 1.1" | length 12.8
  Top Layer w0.3: 124.05,100.95 124.05,102.25 123.85,102.45 123.8,102.45 123.55,102.7 123.55,102.95 132.1,102.95 132.1,100.95
"NetK6_U_rel_ladder 1_8": "K6_U_rel_ladder 1.8" ULN2.12 | length 58.2
  Top Layer w0.2: ULN2.12@62.939,96.961 62.945,96.955 64.295,96.955 v1(64.3,96.95) ; v1(118.65,99.6) 118.65,100.95
  Mid Layer 1 w0.2: v1(64.3,96.95) 64.321,96.971 64.721,96.971 66.2,98.45 117.5,98.45 v1(118.65,99.6)
"NetK6_U_rel_ladder 2_4": "K6_U_rel_ladder 2.4" "K7_U_rel_ladder 2.3" "R4_U_rel_ladder 2.2" "R6_U_rel_ladder 2.1" | length 12.8
  Top Layer w0.3: 126.35,110.7 126.35,108.7 134.9,108.7 134.9,108.95 134.65,109.2 134.6,109.2 134.4,109.4 134.4,110.7
"NetK6_U_rel_ladder 2_6": "K6_U_rel_ladder 2.6" "K7_U_rel_ladder 2.7" "R3_U_rel_ladder 2.2" "R5_U_rel_ladder 2.1" | length 12.8
  Top Layer w0.3: 124.15,116.9 124.15,118.2 123.95,118.4 123.9,118.4 123.65,118.65 123.65,118.9 132.2,118.9 132.2,116.9
"NetK6_U_rel_ladder 2_8": "K6_U_rel_ladder 2.8" ULN1.12 | length 58.2
  Top Layer w0.2: ULN1.12 63.045,112.905 64.395,112.905 v1(64.4,112.9) ; v1(118.75,115.55) 118.75,116.9
  Mid Layer 1 w0.2: v1(64.4,112.9) 64.421,112.921 64.821,112.921 66.3,114.4 117.6,114.4 v1(118.75,115.55)
"NetK7_U_rel_ladder 1_4": "K7_U_rel_ladder 1.4" "K8_U_rel_ladder 1.3" "R2_U_rel_ladder 1.2" "R4_U_rel_ladder 1.1" | length 12.8
  Top Layer w0.3: 136.5,94.75 136.5,92.75 145.05,92.75 145.05,93 144.8,93.25 144.75,93.25 144.55,93.45 144.55,94.75
"NetK7_U_rel_ladder 1_6": "K7_U_rel_ladder 1.6" "K8_U_rel_ladder 1.7" "R1_U_rel_ladder 1.2" "R3_U_rel_ladder 1.1" | length 12.8
  Top Layer w0.3: 134.3,100.95 134.3,102.25 134.1,102.45 134.05,102.45 133.8,102.7 133.8,102.95 142.35,102.95 142.35,100.95
"NetK7_U_rel_ladder 1_8": "K7_U_rel_ladder 1.8" ULN2.11 | length 68.6
  Top Layer w0.2: ULN2.11@62.939,96.461 62.944,96.455 63.795,96.455 v1(63.8,96.45) ; v1(128.9,99.6) 128.9,100.95
  Mid Layer 1 w0.2: v1(63.8,96.45) 64.9,96.45 66.55,98.1 127.4,98.1 v1(128.9,99.6)
"NetK7_U_rel_ladder 2_4": "K7_U_rel_ladder 2.4" "K8_U_rel_ladder 2.3" "R2_U_rel_ladder 2.2" "R4_U_rel_ladder 2.1" | length 12.8
  Top Layer w0.3: 136.6,110.7 136.6,108.7 145.15,108.7 145.15,108.95 144.9,109.2 144.85,109.2 144.65,109.4 144.65,110.7
"NetK7_U_rel_ladder 2_6": "K7_U_rel_ladder 2.6" "K8_U_rel_ladder 2.7" "R1_U_rel_ladder 2.2" "R3_U_rel_ladder 2.1" | length 12.8
  Top Layer w0.3: 134.4,116.9 134.4,118.2 134.2,118.4 134.15,118.4 133.9,118.65 133.9,118.9 142.45,118.9 142.45,116.9
"NetK7_U_rel_ladder 2_8": "K7_U_rel_ladder 2.8" ULN1.11 | length 68.6
  Top Layer w0.2: ULN1.11 63.044,112.406 63.895,112.406 v1(63.9,112.4) ; v1(129,115.55) 129,116.9
  Mid Layer 1 w0.2: v1(63.9,112.4) 65,112.4 66.65,114.05 127.5,114.05 v1(129,115.55)
"NetK8_U_rel_ladder 1_8": "K8_U_rel_ladder 1.8" ULN2.10 | length 80
  Top Layer w0.2: ULN2.10@62.114,95.636 62.124,95.626 62.313,95.816 v1(64.313,95.816) ; v1(139.15,99.6) 139.15,100.95
  Mid Layer 1 w0.2: v1(64.313,95.816) 64.966,95.816 66.9,97.75 137.3,97.75 v1(139.15,99.6)
"NetK8_U_rel_ladder 2_8": "K8_U_rel_ladder 2.8" ULN1.10 | length 80
  Top Layer w0.2: ULN1.10 62.224,111.576 62.254,111.607 v1(63.025,111.607) ; v1(139.25,115.55) 139.25,116.9
  Mid Layer 1 w0.2: v1(63.025,111.607) 64.857,111.607 66.95,113.7 137.4,113.7 v1(139.25,115.55)
NetMCP1_1: MCP1.1 ULN1.2 | length 7.8
  Top Layer w0.2: MCP1.1 58.95,108.377 58.9,108.427 58.9,108.45 57.905,109.445 57.905,113.778 58.038,113.911 ULN1.2
NetMCP1_2: MCP1.2 ULN1.1 | length 8.2
  Top Layer w0.2: MCP1.2 58.3,108.377 58.25,108.427 58.25,108.55 57.603,109.197 57.603,113.903 58.111,114.411 ULN1.1
NetMCP1_3: MCP1.3 ULN1.20 | length 10.8
  Top Layer w0.2: MCP1.3 57.65,108.6 57.302,108.948 57.302,114.102 59.45,116.25 59.85,116.25 60.214,115.886 ULN1.20
NetMCP1_4: MCP1.4 ULN1.19 | length 11.9
  Top Layer w0.2: MCP1.4 57,114.227 59.325,116.552 60.123,116.552 60.714,115.961 ULN1.19
NetMCP1_17: MCP1.17 ULN2.6 | length 8.9
  Top Layer w0.2: MCP1.17 56.35,101.9 56.95,101.3 56.95,98.038 59.363,95.625 ULN2.6
NetMCP1_18: MCP1.18 ULN2.5 | length 7.2
  Top Layer w0.2: MCP1.18 57.019,102.531 57.019,101.781 57.302,101.498 57.302,98.148 59,96.45 ULN2.5
NetMCP1_19: MCP1.19 ULN2.4 | length 6.5
  Top Layer w0.2: MCP1.19 57.65,98.3 59,96.95 ULN2.4
NetMCP1_20: MCP1.20 ULN2.3 | length 5.9
  Top Layer w0.2: MCP1.20 58.281,102.531 58.281,101.781 58,101.5 58,98.45 59,97.45 ULN2.3
NetMCP1_21: MCP1.21 ULN2.2 | length 5.4
  Top Layer w0.2: MCP1.21 58.95,101.9 58.35,101.3 58.35,98.6 58.984,97.966 59.284,97.966 ULN2.2
NetMCP1_22: MCP1.22 ULN2.1 | length 5.1
  Top Layer w0.2: ULN2.1 59.3,99.8 59.75,100.25 59.75,103.3 MCP1.22
NetMCP1_23: MCP1.23 ULN2.20 | length 5.4
  Top Layer w0.2: MCP1.23 60.075,103.975 60.548,103.502 60.548,100.248 60.125,99.825 ULN2.20
NetMCP1_24: MCP1.24 ULN2.19 | length 6.1
  Top Layer w0.2: MCP1.24 60.075,104.625 60.85,103.85 60.85,100.1 60.641,99.891 60.641,99.627 60.635,99.62 60.635,99.285 ULN2.19
NetMCP1_25: MCP1.25 ULN1.6 | length 8.4
  Top Layer w0.2: MCP1.25 60.075,105.275 61.052,106.252 61.052,108.498 59.5,110.05 59.5,111.469 59.617,111.586 ULN1.6
NetMCP1_26: MCP1.26 ULN1.5 | length 8.4
  Top Layer w0.2: ULN1.5 58.927,112.411 58.81,112.294 58.81,110.167 60.75,108.227 60.75,106.6 60.075,105.925 MCP1.26
NetMCP1_27: MCP1.27 ULN1.4 | length 8.4
  Top Layer w0.2: ULN1.4 58.664,112.911 58.508,112.755 58.508,109.942 60.427,108.023 60.427,106.927 60.075,106.575 MCP1.27
NetMCP1_28: MCP1.28 ULN1.3 | length 7.8
  Top Layer w0.2: ULN1.3 58.467,113.411 58.206,113.15 58.206,109.694 59.725,108.175 MCP1.28
NetR18_2: R18.2 U1.6 | length 1.1
  Top Layer w0.2: R18.2 44.111,109.557 U1.6
NetR23_2: R23.2 U1.12 | length 1.1
  Top Layer w0.2: R23.2 45.605,106.005 45.605,106.083 U1.12
NetR24_2: R24.2 U1.13 | length 1.2
  Top Layer w0.2: R24.2 45.65,105.15 45.85,105.35 45.85,105.691 U1.13
NetR25_2: R25.2 U1.15 | length 1.2
  Top Layer w0.2: U1.15 47.753,105.279 47.753,104.575 R25.2
R\E\S\E\T\: P3.10 P4.10 R19.2 U1.25 | length 22.1
  Top Layer w0.2: v1(45.595,98.795) 45.595,97.215 P4.10 ; v1(45.6,116.35) 45.6,118 P3.10 ; U1.25 48.8,109.914 v1(48.8,110.15)
  Bottom Layer w0.2: v1(45.595,98.795) 45.543,98.795 45.1,99.237 45.1,115.85 v1(45.6,116.35)
RGND: C2.2 C4.2 J3.1 ULN1.8 ULN1.21 ULN2.8 ULN2.21 | length 4.2
  Top Layer w0.2: v1(60.25,94.65) C4.2 60.96,94.686 61.125,94.851 ULN2.8 ; v1(60.35,110.6) C2.2 61.01,110.636 61.214,110.84 ULN1.8 ; J3.1 v1(63.15,105.1)
  other v2: 60.575,96.9 61.675,96.9 60.575,98 61.675,98 60.664,112.861 61.764,112.861 60.664,113.961 61.764,113.961
S\S\: P3.8 P4.8 R23.1 | length 23
  Top Layer w0.2: v1(43.95,104.4) 43.975,104.4 44.464,104.889 R23.1 ; v1(44.3,116.35) 44.3,117.97 P3.8 ; P4.8 44.35,97.22 44.34,97.23 44.349,97.239 v1(44.349,98.811)
  Bottom Layer w0.2: v1(43.95,104.4) 43.969,104.4 44.75,105.181 ; v1(44.3,116.35) 44.75,115.9 44.75,105.181 ; v1(44.349,98.811) 44.75,99.212 44.75,105.181
SCK: P3.6 P4.6 R25.1 | length 32.1
  Top Layer w0.2: v1(43.05,98.8) 43.05,97.22 P4.6 ; P3.6 43.1,117.97 v1(43.1,116.35) ; v1(47.95,103.45) 47.95,103.489 48.361,103.9 R25.1
  Mid Layer 2 w0.2: v1(43.05,98.8) 44.4,100.15 44.4,101.75 46.1,103.45 v1(47.95,103.45)
  Bottom Layer w0.2: v1(43.05,98.8) 42.25,99.6 41.2,99.6 40.35,100.45 40.35,113.6 v1(43.1,116.35)
SCL: MCP1.8 R22.2 U1.24 | length 6.9
  Top Layer w0.2: U1.24 48.858,109.335 51.753,109.335 52.768,108.321 52.768,107.722 53.23,107.26 R22.2 53.268,107.243 54.257,107.243 MCP1.8
SDA: MCP1.9 R21.2 U1.23 | length 6.4
  Top Layer w0.2: U1.23 49.176,109.017 50.423,109.017 52.18,107.26 R21.2 52.22,107.26 52.905,106.575 MCP1.9
pads on no net: "K1_U_rel_ladder 1.2" "K1_U_rel_ladder 1.5" "K1_U_rel_ladder 2.2" "K1_U_rel_ladder 2.5" "K2_U_rel_ladder 1.2" "K2_U_rel_ladder 1.5" "K2_U_rel_ladder 2.2" "K2_U_rel_ladder 2.5" "K3_U_rel_ladder 1.2" "K3_U_rel_ladder 1.5" "K3_U_rel_ladder 2.2" "K3_U_rel_ladder 2.5" "K4_U_rel_ladder 1.2" "K4_U_rel_ladder 1.5" "K4_U_rel_ladder 2.2" "K4_U_rel_ladder 2.5" "K5_U_rel_ladder 1.2" "K5_U_rel_ladder 1.5" "K5_U_rel_ladder 2.2" "K5_U_rel_ladder 2.5" "K6_U_rel_ladder 1.2" "K6_U_rel_ladder 1.5" "K6_U_rel_ladder 2.2" "K6_U_rel_ladder 2.5" "K7_U_rel_ladder 1.2" "K7_U_rel_ladder 1.5" "K7_U_rel_ladder 2.2" "K7_U_rel_ladder 2.5" "K8_U_rel_ladder 1.2" "K8_U_rel_ladder 1.5" "K8_U_rel_ladder 2.2" "K8_U_rel_ladder 2.5" LD1.4 MCP1.7 MCP1.10 MCP1.15 MCP1.16 MCP1.29 U1.1 U1.2 U1.5 U1.7 U1.8 U1.9 U1.10 U1.11 U1.17 U1.19 U1.20 U1.21 U1.22 U1.26 U1.27 U1.28 ULN1.7 ULN1.18 ULN2.7 ULN2.18
copper on no net:
  other v2: 55.9,104.175 57,104.175 58.1,104.175 55.9,105.275 57,105.275 58.1,105.275 55.9,106.375 57,106.375 58.1,106.375
  other v3: 157.165,89.537 39.25,89.55 39.25,122.5 157.25,122.5

## Polygon pours and split planes (outlines as drawn)
GND on Top Layer "NONET_L-01_P-001" (solid, remove dead copper, shelved, pour order 0): 36.75,87.05 58.948,87.05 58.948,125 36.75,125
RGND on Top Layer "NONET_L-01_P-001" (solid, remove dead copper, shelved, pour order 0): 159.75,87.05 59.352,87.05 59.352,125 159.75,125
RGND on Mid Layer 1 "NONET_L-01_P-001" (solid, remove dead copper, shelved, pour order 1): 159.75,87.05 59.352,87.05 59.352,125 159.75,125
GND on Mid Layer 2 "NONET_L-01_P-001" (solid, remove dead copper, shelved, pour order 2): 159.75,87.05 59.352,87.05 59.352,125 159.75,125
GND on Bottom Layer "NONET_L-01_P-001" (solid, remove dead copper, shelved, pour order 3): 159.75,87.05 59.352,87.05 59.352,125 159.75,125

## Silkscreen, mask and mechanical layers (free items; w line width, h text height)
Mechanical 1:
  the board outline again, w0.2